# EAGLE board fruktofon (EAGLE 6.5.0)
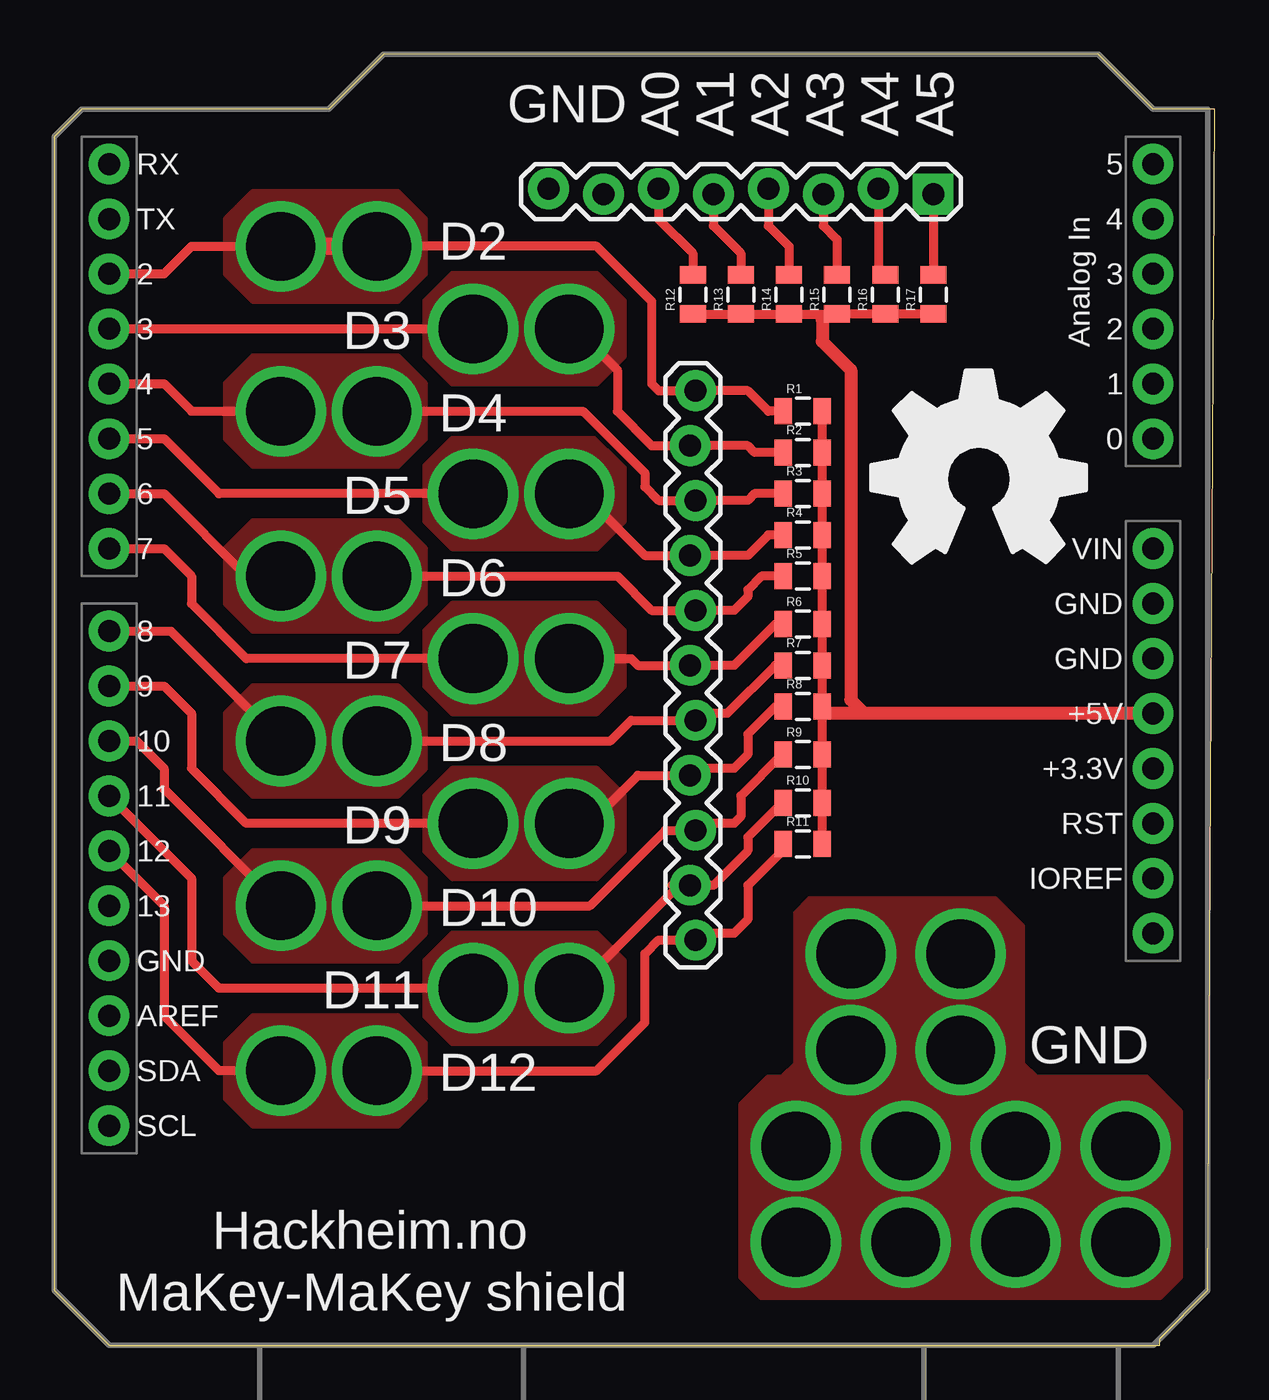
[diagram p0: board, top side]
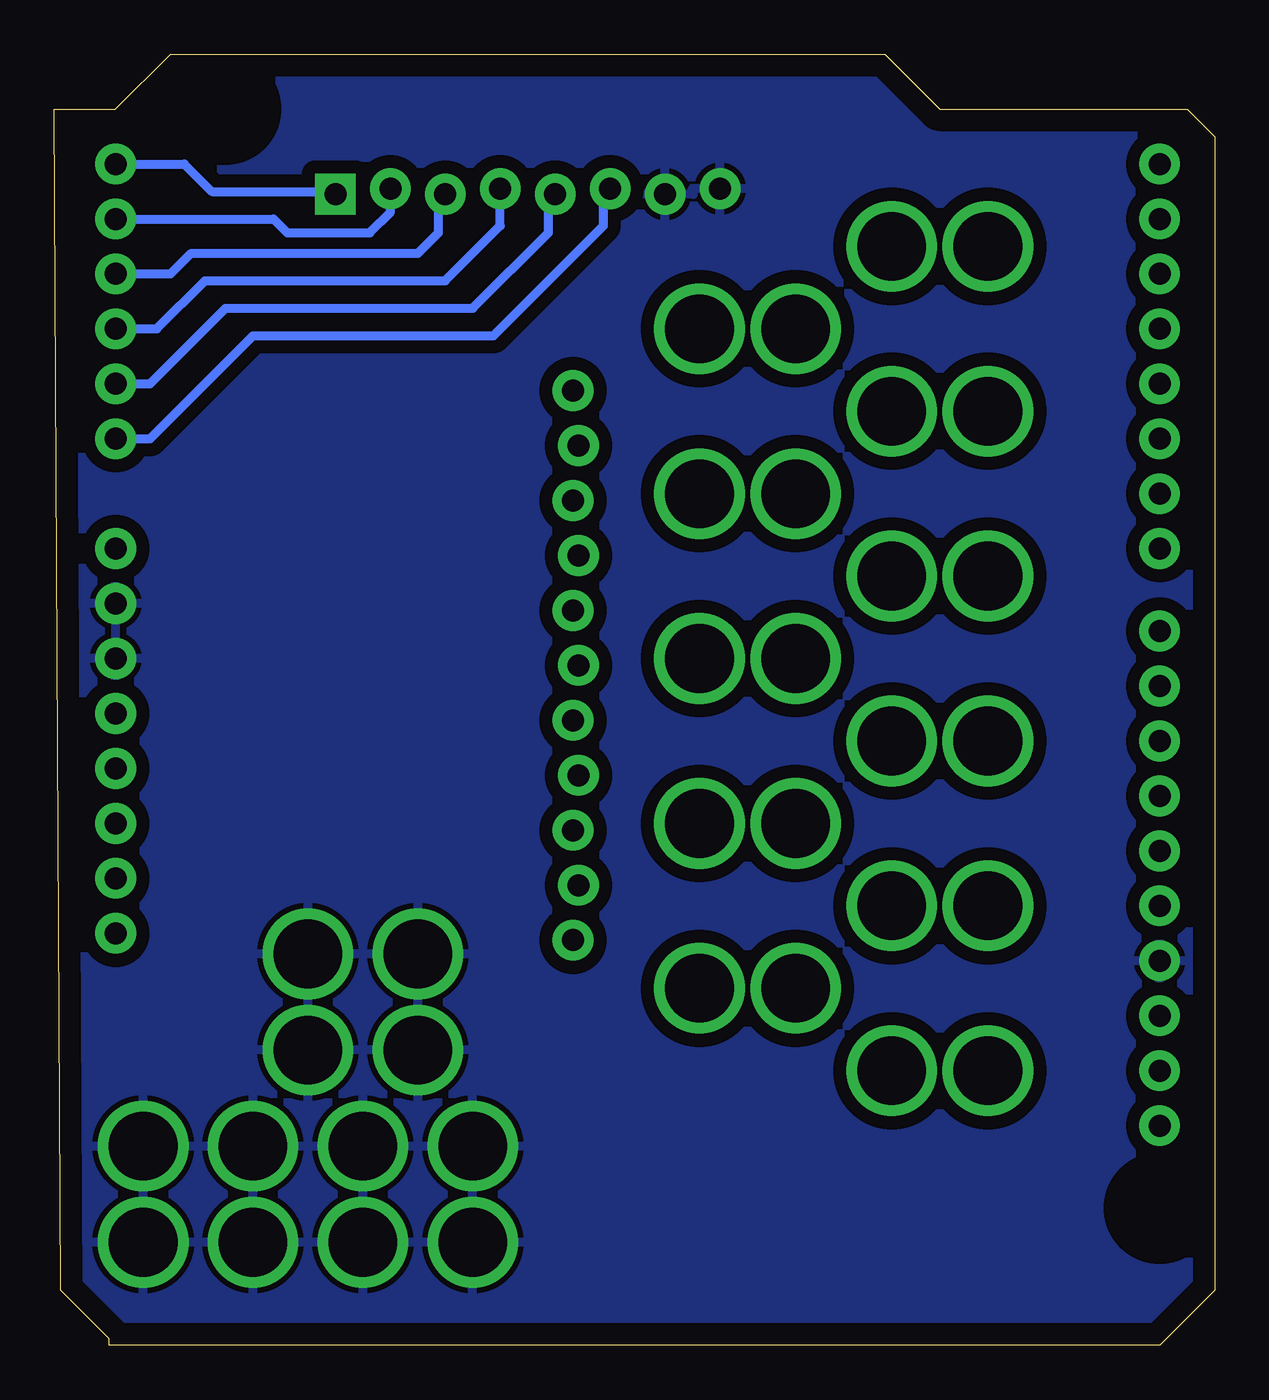
[diagram p1: board, bottom side, seen from below]

Size 53.65 x 59.69 mm. Coordinates in mm from the lower left corner, seen from the top.
Outline: 2.54,0 51.1,0 51.1,0.3 53.34,2.54 53.65,57.14 50.81,57.14 48.26,59.69 15.24,59.69 12.7,57.15 1.27,57.15 0,55.88 0,2.54 2.54,0
Copper layers (1*16): Top 0.035mm / dielectric 1.5mm / Bottom 0.035mm
Design rules "default": minimum track width 10mil, minimum drill 24mil, track to track 8mil, track to pad 8mil, pad to pad 8mil, via to via 8mil, smd to smd 8mil, copper to edge 40mil, drill to drill 8mil, minimum pad ring 10mil, minimum via ring 8mil, stop-mask expansion 4mil, vias tented up to drill 0mil, thermal gap 10mil

## Footprints (pad centres in the part's own frame; a part is rotated, then mirrored left to right if it is on the bottom)
1X08_LOCK = drill 1.016 pad 1.88 square: 1 0,0.127 | drill 1.016 pad 1.88: 2 2.54,-0.127; 3 5.08,0.127; 4 7.62,-0.127; 5 10.16,0.127; 6 12.7,-0.127; 7 15.24,0.127; 8 17.78,-0.127
1X11_LOCK = drill 1.016 pad 1.88: 1 0,0.127; 2 2.54,-0.127; 3 5.08,0.127; 4 7.62,-0.127; 5 10.16,0.127; 6 12.7,-0.127; 7 15.24,0.127; 8 17.78,-0.127; 9 20.32,0.127; 10 22.86,-0.127; 11 25.4,0.127
0805 = smd 0.8 x 1.2: 1 -0.9,0; 2 0.9,0
UNO_R3_SHIELD = drill 1.016 pad 1.88: 3.3V 50.8,26.67; 5V 50.8,29.21; A0 50.8,41.91; A1 50.8,44.45; A2 50.8,46.99; A3 50.8,49.53; A4 50.8,52.07; A5 50.8,54.61; AREF 2.54,15.24; D2 2.54,49.53; D3 2.54,46.99; D4 2.54,44.45; D5 2.54,41.91; D6 2.54,39.37; D7 2.54,36.83; D8 2.54,33.02; D9 2.54,30.48; D10 2.54,27.94; D11 2.54,25.4; D12 2.54,22.86; D13 2.54,20.32; GND@0 50.8,31.75; GND@1 50.8,34.29; GND@2 2.54,17.78; IOREF 50.8,21.59; NC 50.8,19.05; RES 50.8,24.13; RX 2.54,54.61; SCL 2.54,10.16; SDA 2.54,12.7; TX 2.54,52.07; VIN 50.8,36.83
1X01_ALLIGATOR_3MM = drill 3.175: 1@0 0,2.223; 1@2 0,-2.223

## Placement (x,y rotation side)
JP1  NA  [1X08_LOCK]  40.64,53.34 180 top
JP2  M11LOCK  [1X11_LOCK]  29.53,44.13 270 top
LOGO1  OSHW_LOGO_FILLX0350-NT  [OSHW_FILLX350_NOTEXT]  37.78,36.2 0 top
R1  22M  [0805]  34.61,43.18 0 top
R2  22M  [0805]  34.61,41.27 0 top
R3  22M  [0805]  34.61,39.37 0 top
R4  22M  [0805]  34.61,37.47 0 top
R5  22M  [0805]  34.61,35.56 0 top
R6  22M  [0805]  34.61,33.34 0 top
R7  22M  [0805]  34.61,31.43 0 top
R8  22M  [0805]  34.61,29.53 0 top
R9  22M  [0805]  34.61,27.3 0 top
R10  22M  [0805]  34.61,25.08 0 top
R11  22M  [0805]  34.61,23.18 0 top
R12  22M  [0805]  29.53,48.58 90 top
R13  22M  [0805]  31.75,48.58 90 top
R14  22M  [0805]  33.97,48.58 90 top
R15  22M  [0805]  36.2,48.58 90 top
R16  22M  [0805]  38.42,48.58 90 top
R17  22M  [0805]  40.64,48.58 90 top
U$1  ARDUINO_R3_SHIELD  [UNO_R3_SHIELD]  0,0 0 top
UP1  [1X01_ALLIGATOR_3MM]  12.7,50.8 90 top
UP2  [1X01_ALLIGATOR_3MM]  21.59,46.99 90 top
UP3  [1X01_ALLIGATOR_3MM]  12.7,43.18 90 top
UP4  [1X01_ALLIGATOR_3MM]  21.59,39.37 270 top
UP5  [1X01_ALLIGATOR_3MM]  12.7,35.56 90 top
UP6  [1X01_ALLIGATOR_3MM]  21.59,31.75 90 top
UP7  [1X01_ALLIGATOR_3MM]  12.7,27.94 90 top
UP8  [1X01_ALLIGATOR_3MM]  21.59,24.13 270 top
UP9  [1X01_ALLIGATOR_3MM]  12.7,20.32 270 top
UP10  [1X01_ALLIGATOR_3MM]  21.59,16.51 270 top
UP11  [1X01_ALLIGATOR_3MM]  12.7,12.7 270 top
UP12  [1X01_ALLIGATOR_3MM]  41.91,15.88 0 top
UP13  [1X01_ALLIGATOR_3MM]  36.83,15.88 0 top
UP14  [1X01_ALLIGATOR_3MM]  34.29,6.99 0 top
UP15  [1X01_ALLIGATOR_3MM]  39.37,6.99 0 top
UP16  [1X01_ALLIGATOR_3MM]  44.45,6.99 0 top
UP17  [1X01_ALLIGATOR_3MM]  49.53,6.99 0 top

## Library data of the parts
JP1 JP2 UP1-UP17 = SparkFun-Connectors
LOGO1 = ohw-logo
R1-R17 = SparkFun-Resistors
U$1 = SparkFun-Boards

## Nets
+5V: R1.2 R2.2 R3.2 R4.2 R5.2 R6.2 R7.2 R8.2 R9.2 R10.2 R11.2 R12.1 R13.1 R14.1 R15.1 R16.1 R17.1 U$1.5V
D2: JP2.1 R1.1 U$1.D2 UP1.1@0 UP1.1@2
D3: JP2.2 R2.1 U$1.D3 UP2.1@0 UP2.1@2
D4: JP2.3 R3.1 U$1.D4 UP3.1@0 UP3.1@2
D5: JP2.4 R4.1 U$1.D5 UP4.1@0 UP4.1@2
D6: JP2.5 R5.1 U$1.D6 UP5.1@0 UP5.1@2
D7: JP2.6 R6.1 U$1.D7 UP6.1@0 UP6.1@2
D8: JP2.7 R7.1 U$1.D8 UP7.1@0 UP7.1@2
D9: JP2.8 R8.1 U$1.D9 UP8.1@0 UP8.1@2
D10: JP2.9 R9.1 U$1.D10 UP9.1@0 UP9.1@2
D11: JP2.10 R10.1 U$1.D11 UP10.1@0 UP10.1@2
D12: JP2.11 R11.1 U$1.D12 UP11.1@0 UP11.1@2
GND: JP1.7 JP1.8 U$1.GND@0 U$1.GND@1 U$1.GND@2 UP12.1@0 UP12.1@2 UP13.1@0 UP13.1@2 UP14.1@0 UP14.1@2 UP15.1@0 UP15.1@2 UP16.1@0 UP16.1@2 UP17.1@0 UP17.1@2
N$1: JP1.6 R12.2 U$1.A0
N$2: JP1.5 R13.2 U$1.A1
N$3: JP1.4 R14.2 U$1.A2
N$4: JP1.3 R15.2 U$1.A3
N$5: JP1.2 R16.2 U$1.A4
N$6: JP1.1 R17.2 U$1.A5

## Tracks (layer width: path | path; a pad name or v marks a point on that pad's centre or on a via)
+5V
  Top 0.406: 35.83,29.21 R8.2 | R11.2 R10.2 R9.2 R8.2 | R8.2 R7.2 R6.2 R5.2 R4.2 R3.2 R2.2 R1.2 | R17.1 R16.1 R15.1 35.24,47.68 | R12.1 R13.1 R14.1 35.24,47.68 | 35.51,47.41 35.24,47.68
  Top 0.61: U$1.5V 37.47,29.21 | 37.47,29.21 35.83,29.21 | 35.51,47.41 35.51,46.41 36.83,45.09 36.83,29.84 37.47,29.21
D2
  Top 0.406: U$1.D2 5.08,49.53 6.35,50.8 UP1.1@0 | R1.1 33.02,43.18 32.07,44.13 JP2.1 27.94,44.13 27.62,44.45 27.62,48.26 25.08,50.8 14.29,50.8
  Top 0.813: UP1.1@0 14.29,50.8 UP1.1@2
  pour Top (no thermals): 7.94,52.07 9.21,53.34 15.88,53.34 17.14,52.07 17.14,49.53 15.88,48.26 9.21,48.26 7.94,49.53
D3
  Top 0.406: 24.13,46.99 26.04,45.09 26.04,43.18 27.62,41.59 JP2.2 32.07,41.59 32.38,41.27 R2.1 | U$1.D3 UP2.1@0
  pour Top (no thermals): 17.14,48.26 18.41,49.53 25.08,49.53 26.35,48.26 26.35,45.72 25.08,44.45 18.41,44.45 17.14,45.72
D4
  Top 0.406: U$1.D4 5.08,44.45 6.35,43.18 UP3.1@0 | R3.1 32.38,39.37 32.07,39.05 JP2.3 27.94,39.05 27.3,39.69 27.3,40.32 24.45,43.18 UP3.1@2
  pour Top (no thermals): 7.94,44.45 9.21,45.72 15.88,45.72 17.14,44.45 17.14,41.91 15.88,40.64 9.21,40.64 7.94,41.91
D5
  Top 0.406: U$1.D5 5.08,41.91 7.62,39.37 UP4.1@2 | 24.45,39.37 27.3,36.51 JP2.4 32.07,36.51 33.02,37.47 R4.1
  pour Top (no thermals): 17.14,40.64 18.41,41.91 25.08,41.91 26.35,40.64 26.35,38.1 25.08,36.83 18.41,36.83 17.14,38.1
D6
  Top 0.406: U$1.D6 5.08,39.37 8.89,35.56 | R5.1 32.7,35.56 32.07,34.92 32.07,34.61 31.43,33.97 JP2.5 27.62,33.97 26.04,35.56 UP5.1@2
  pour Top (no thermals): 7.94,36.83 9.21,38.1 15.88,38.1 17.14,36.83 17.14,34.29 15.88,33.02 9.21,33.02 7.94,34.29
D7
  Top 0.406: U$1.D7 5.08,36.83 6.35,35.56 6.35,34.29 8.89,31.75 UP6.1@0 | R6.1 33.34,33.34 31.43,31.43 JP2.6 26.99,31.43 26.67,31.75 UP6.1@2
  pour Top (no thermals): 17.14,33.02 18.41,34.29 25.08,34.29 26.35,33.02 26.35,30.48 25.08,29.21 18.41,29.21 17.14,30.48
D8
  Top 0.406: U$1.D8 5.4,33.02 UP7.1@0 | R7.1 33.34,31.43 31.11,29.21 29.97,29.21 JP2.7 26.67,28.89 25.72,27.94 UP7.1@2
  pour Top (no thermals): 7.94,29.21 9.21,30.48 15.88,30.48 17.14,29.21 17.14,26.67 15.88,25.4 9.21,25.4 7.94,26.67
D9
  Top 0.406: U$1.D9 5.08,30.48 6.35,29.21 6.35,26.67 8.89,24.13 UP8.1@2 | 24.77,24.13 26.99,26.35 JP2.8 29.72,26.67 31.43,26.67 32.07,27.3 32.07,28.26 33.34,29.53 R8.1
  pour Top (no thermals): 17.14,25.4 18.41,26.67 25.08,26.67 26.35,25.4 26.35,22.86 25.08,21.59 18.41,21.59 17.14,22.86
D10
  Top 0.406: U$1.D10 3.81,27.94 5.08,26.67 5.08,25.72 UP9.1@2 | R9.1 33.66,27.3 31.75,25.4 31.75,24.45 31.43,24.13 29.97,24.13 JP2.9 28.26,23.81 24.77,20.32 UP9.1@0
  pour Top (no thermals): 7.94,21.59 9.21,22.86 15.88,22.86 17.14,21.59 17.14,19.05 15.88,17.78 9.21,17.78 7.94,19.05
D11
  Top 0.406: U$1.D11 6.35,21.59 6.35,17.78 7.62,16.51 UP10.1@2 | R10.1 33.66,25.08 32.07,23.5 32.07,22.86 30.48,21.27 JP2.10 28.89,21.27 | 28.89,21.27 28.57,21.27 | UP10.1@0 24.13,16.51 28.89,21.27
  pour Top (no thermals): 17.14,17.78 18.41,19.05 25.08,19.05 26.35,17.78 26.35,15.24 25.08,13.97 18.41,13.97 17.14,15.24
D12
  Top 0.406: U$1.D12 5.08,20.32 5.08,15.24 7.62,12.7 UP11.1@2 | R11.1 33.71,22.91 32.07,21.27 32.07,19.68 31.43,19.05 29.97,19.05 JP2.11 27.94,18.73 27.3,18.1 27.3,14.92 25.08,12.7 UP11.1@0
  pour Top (no thermals): 7.94,13.97 9.21,15.24 15.88,15.24 17.14,13.97 17.14,11.43 15.88,10.16 9.21,10.16 7.94,11.43
GND
  pour Bottom (isolate 0.61, rank 2): 2.54,0 0,2.54 0,55.88 1.27,57.15 12.7,57.15 15.24,59.69 48.26,59.69 50.8,57.15 53.34,57.15 53.34,2.54 50.8,0
  pour Top (no thermals): 52.07,10.79 50.48,12.38 45.4,12.38 44.77,13.02 44.77,19.37 43.5,20.64 34.92,20.64 34.29,20 34.29,13.02 33.66,12.38 33.02,12.38 31.75,11.11 31.75,3.17 32.7,2.22 51.12,2.22 52.07,3.17
N$1
  Top 0.406: JP1.6 27.94,52.07 29.53,50.48 R12.2
  Bottom 0.406: U$1.A0 49.21,41.91 44.45,46.67 33.34,46.67 28.26,51.75 28.26,53.15 JP1.6
N$2
  Top 0.406: JP1.5 30.48,51.75 31.75,50.48 R13.2
  Bottom 0.406: U$1.A1 49.21,44.45 45.72,47.94 34.29,47.94 30.8,51.44 30.8,52.9 JP1.5
N$3
  Top 0.406: JP1.4 33.02,51.75 33.97,50.8 R14.2
  Bottom 0.406: U$1.A2 48.9,46.99 46.67,49.21 35.56,49.21 33.02,51.75 JP1.4
N$4
  Top 0.406: JP1.3 35.56,51.75 36.2,51.12 R15.2
  Bottom 0.406: U$1.A3 48.26,49.53 47.31,50.48 36.83,50.48 35.88,51.44 35.88,52.9 JP1.3
N$5
  Top 0.406: JP1.2 38.1,49.8 R16.2
  Bottom 0.406: U$1.A4 43.5,52.07 42.86,51.44 39.05,51.44 38.1,52.39 JP1.2
N$6
  Top 0.406: JP1.1 R17.2
  Bottom 0.406: U$1.A5 47.62,54.61 46.35,53.34 40.77,53.34 JP1.1

## Text on the board
tNames: GND | A0 | A1 | A2 | A3 | A4 | A5 | D2 | D3 | D4 | D5 | D6 | D7 | D8 | D9 | D10 | D11 | GND | D12 | Hackheim.no | MaKey-MaKey shield